# Altium PCB Dout24x.PcbDoc
Units mil, origin at the board's own origin, x right, y up, seen from the top; angles counter-clockwise.
Board outline 2913.39 x 1181.1 mil, 2 copper layers (Top Layer, Bottom Layer); 18 components, 58 nets, 158 pads, 14 vias.
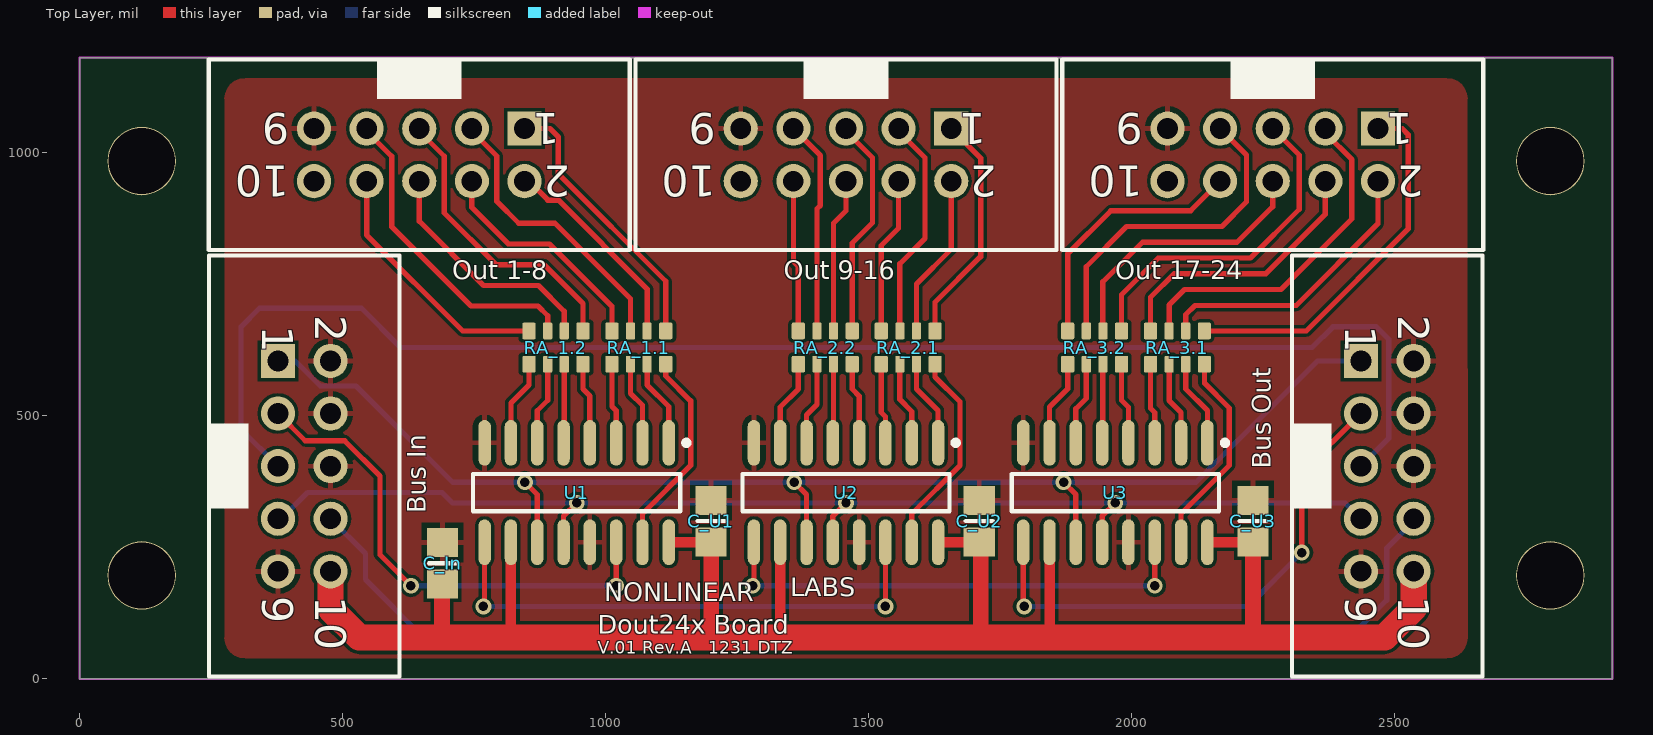
[diagram p0: Top Layer view]
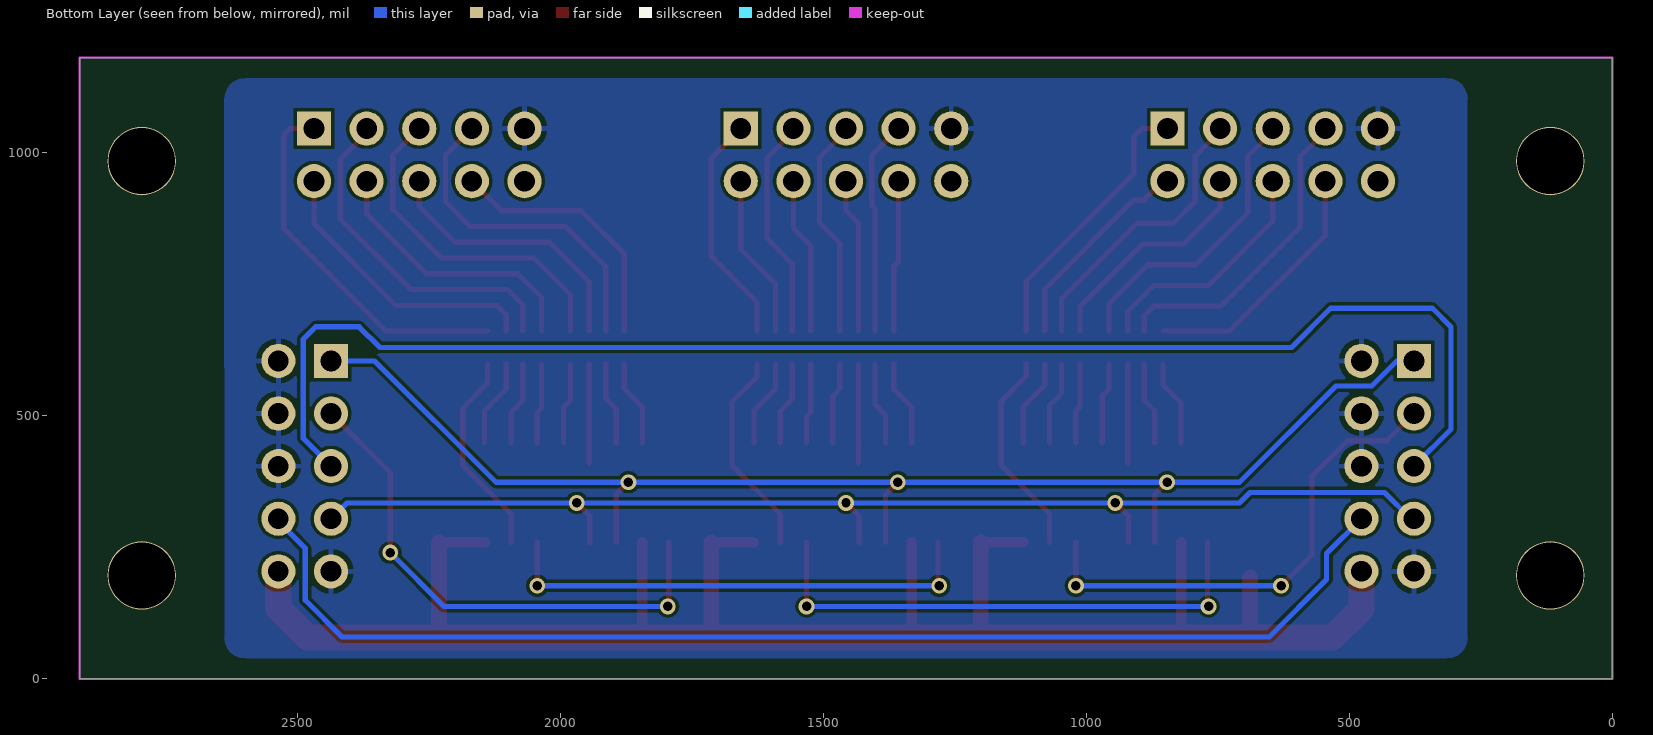
[diagram p1: Bottom Layer view, seen from below]

## Layer stack, top to bottom
Top Layer: signal copper 1.4
Dielectric: core 12.6, FR-4, Dk 4.8
Bottom Layer: signal copper 1.4

## Board outline
0,0 0,1181.1 2913.39,1181.1 2913.39,0

## Design rules (kind name [scope] priority, off if disabled: settings)
Clearance [All] p1: gap=6
ComponentClearance [All] p1 off: gap=10 collisioncheckmode=3 verticalgap=10 showdistances=FALSE
HoleSize [All] p1: absolutevalues=TRUE maxlimit=196.85 minlimit=1 maxpercent=80.000 minpercent=20.000
MinimumSolderMaskSliver [All] p1: minsoldermaskwidth=6
PolygonConnect [All] p1: connectstyle=Relief reliefconductorwidth=10 reliefentries=4 polygonreliefangle="90 Angle" airgapwidth=10
RoutingVias [All] p1: holewidth=28 width=50 viastyle="Through Hole" minholewidth=28 minwidth=50 maxholewidth=28 maxwidth=50
SilkToSilkClearance [All] p1 off: silktosilkclearance=6
SilkscreenOverComponentPads [All] p1 off: minsilkscreentomaskgap=6
SolderMaskExpansion [All] p1: expansion=4
Width [All] p1: maxlimit=78.74 minlimit=6 preferedwidth=10
23 further rules are at their usual default settings.

## Components (designator, comment, footprint, x,y, rotation, side; value= is the part's Value field where it differs from the comment)
"Bus In" "10 pol" 918510x324 427.17,404.53 r270 top (schematic designator P_In)
"Bus Out" "10 pol" 918510x324 2485.43,404.53 r270 top (schematic designator P_Out)
C_In "Cap Semi" 6-0805_M 690,220 r270 top
C_U1 "Cap Semi" 6-0805_M 1200,300 r270 top
C_U2 "Cap Semi" 6-0805_M 1710,300 r270 top
C_U3 "Cap Semi" 6-0805_M 2230,300 r270 top
"Out 1-8" "10 pol" 918510x324 645.67,996.06 r180 top (schematic designator P_Dout_1-8)
"Out 9-16" "10 pol" 918510x324 1456.69,996.06 r180 top (schematic designator P_Dout_9-16)
"Out 17-24" "10 pol" 918510x324 2267.72,996.06 r180 top (schematic designator P_Dout_17-24)
RA_1.1 "EXB38" EXB38 1062.99,629.92 r180 top
RA_1.2 "EXB38" EXB38 905.51,629.92 r180 top
RA_2.1 "EXB38" EXB38 1574.8,629.92 r180 top
RA_2.2 "EXB38" EXB38 1417.32,629.92 r180 top
RA_3.1 "EXB38" EXB38 2086.61,629.92 r180 top
RA_3.2 "EXB38" EXB38 1929.13,629.92 r180 top
U1 "SN74HC595D" D016_N 944.88,354.33 r270 top
U2 "SN74HC595D" D016_N 1456.69,354.33 r270 top
U3 "SN74HC595D" D016_N 1968.5,354.33 r270 top

## Footprints (in the part's own frame and the unit in brackets; to place one, negate y for a bottom-side part, rotate by r counter-clockwise, add the part's x,y. Pads: shape width x height; smd on the part's side, far side on the other; paste and mask are expansions set on the pad)
6-0805_M [mm] "Chip Resistor, Body 2.0x1.2mm, IPC Low Density"
  rect 1.4x1.5 smd: 1(-1,0) 2(1,0)
  silkscreen extent 0,-0.65 0,0.65, body extent -1.07,-0.7 1.07,0.7, height 0.7
918510x324 [mm] "Connector; IDC, Low Profile Male Header, Thru-Hole; 10 Position; Vertical; Pitch 2.54 mm; Body 20.32 x 9.2 x 9.45 mm (LxWxH)"
  rect 1.65x1.65 hole 1: 1(-5.08,-1.27)
  round 1.65 hole 1: 2(-5.08,1.27) 3(-2.54,-1.27) 4(-2.54,1.27) 5(0,-1.27) 6(0,1.27) 7(2.54,-1.27) 8(2.54,1.27) 9(5.08,-1.27) 10(5.08,1.27)
  silkscreen extent -10.16,-4.6 10.16,4.6
D016_N [mm] "SOIC, 16-Leads, Body 9.9x3.9mm, Pitch 1.27mm, IPC Medium Density"
  oval 2.2x0.6 smd: 1(-2.4,4.445) 2(-2.4,3.175) 3(-2.4,1.905) 4(-2.4,0.635) 5(-2.4,-0.635) 6(-2.4,-1.905) 7(-2.4,-3.175) 8(-2.4,-4.445) 9(2.4,-4.445) 10(2.4,-3.175) 11(2.4,-1.905) 12(2.4,-0.635) 13(2.4,0.635) 14(2.4,1.905) 15(2.4,3.175) 16(2.4,4.445)
  silkscreen extent -2.52,-5 0.9,5.42, body extent -1.95,-4.95 1.95,4.95, height 1.75
EXB38 [mm]
  rrect20% 0.64x0.8 smd: 1(-1.3,-0.8) 4(1.3,-0.8) 5(1.3,0.8) 8(-1.3,0.8)
  rrect20% 0.44x0.8 smd: 2(-0.4,-0.8) 3(0.4,-0.8) 6(0.4,0.8) 7(-0.4,0.8)

## Part data
"Bus In" "Bus Out" "Out 1-8" "Out 9-16" "Out 17-24": library part "09 18 510 6324", "Flat Cable Connector (IDC), Low-Profile Male Header, Straight Solder Pin, 10 Contacts, Performance Level 2"
C_In C_U1 C_U2 C_U3: "Capacitor (Semiconductor SIM Model)"
RA_1.1 RA_1.2 RA_2.1 RA_2.2 RA_3.1 RA_3.2: library part "4 Resistors Parallel"
U1 U2 U3: "8-Bit Shift Register with 3-State Output Registers"

## Free pads (board coordinates)
  round 129.92 hole 125.98: ""(118.11,196.85) ""(118.11,984.25) ""(2795.28,196.85) ""(2795.28,984.25)

## Via types
v1: diameter 30, hole 18, Top Layer to Bottom Layer, 14 vias

## Nets (pads, with @x,y where several pads share a name; then routed paths per layer and width w, separated by ;. In a path a pad name is that pad's centre, name@x,y a point inside that pad or via, vN(x,y) a via of type N, cw(c..) or ccw(c..) an arc to the next point about the centre after c; other vN are vias at no path point)
CL: "Bus In.1" "Bus Out.1" U1.11 U2.11 U3.11 | length 2620.9
  Top Layer w10: v1(846.46,374.02) 869.88,350.59 U1.11 ; v1(1358.27,374.02) 1381.69,350.59 U2.11 ; v1(1870.08,374.02) 1893.5,350.59 U3.11
  Bottom Layer w10: 377.17,604.53 410.02,604.53 457.5,557.05 525.63,557.05 708.66,374.02 v1(846.46,374.02) v1(1358.27,374.02) v1(1870.08,374.02) 2122.05,374.02 2352.56,604.53 2435.43,604.53
GND: "Bus In.2" "Bus In.4" "Bus In.6" "Bus In.9" "Bus Out.2" "Bus Out.4" "Bus Out.6" "Bus Out.9" "Out 1-8.9" "Out 9-16.9" "Out 17-24.9" C_In.1 C_U1.1 C_U2.1 C_U3.1 U1.8 U1.13 U2.8 U2.13 U3.8 U3.13
ID: "Bus In.5" "Bus Out.5" | length 2809.4
  Bottom Layer w10: 377.17,404.53 307.09,474.61 307.09,669.29 342.52,704.72 535.43,704.72 610.24,629.92 2342.52,629.92 2381.89,669.29 2464.57,669.29 2487.95,645.91 2487.95,457.05 2435.43,404.53
IG: "Bus In.8" "Bus Out.8" | length 2334
  Bottom Layer w10: 477.17,304.53 543.31,238.39 543.31,188.98 652.28,80 2414.65,80 2484.25,149.61 2484.25,248.31 2535.43,299.49 2535.43,304.53
NetRA_1.1_5: RA_1.1.5 U1.3 | length 152.9
  Top Layer w10: RA_1.1.5 1011.81,518.19 1019.88,510.12 U1.3
NetRA_1.1_6: RA_1.1.6 U1.2 | length 159
  Top Layer w10: RA_1.1.6 1047.24,542.76 1069.88,520.12 U1.2
NetRA_1.1_7: RA_1.1.7 U1.1 | length 166.6
  Top Layer w10: RA_1.1.7 1078.74,559.06 1119.88,517.91 U1.1
NetRA_1.1_8: RA_1.1.8 U1.15 | length 396.1
  Top Layer w10: U1.15 1069.88,313.98 1161.42,405.51 1161.42,528.58 1114.17,575.83 RA_1.1.8
NetRA_1.2_5: RA_1.2.5 U1.7 | length 163.9
  Top Layer w10: U1.7 819.88,524.61 854.33,559.06 RA_1.2.5
NetRA_1.2_6: RA_1.2.6 U1.6 | length 157.8
  Top Layer w10: U1.6 869.88,509.88 889.76,529.76 RA_1.2.6
NetRA_1.2_7: RA_1.2.7 U1.5 | length 187.6
  Top Layer w10: U1.5@921.26,410.83 RA_1.2.7
NetRA_1.2_8: RA_1.2.8 U1.4 | length 155.1
  Top Layer w10: RA_1.2.8 956.69,551.18 969.88,537.99 U1.4
NetRA_2.1_5: RA_2.1.5 U2.3 | length 152.9
  Top Layer w10: RA_2.1.5 1523.62,506.38 1531.69,498.31 U2.3
NetRA_2.1_6: RA_2.1.6 U2.2 | length 159
  Top Layer w10: RA_2.1.6 1559.05,530.94 1581.69,508.31 U2.2
NetRA_2.1_7: RA_2.1.7 U2.1 | length 166.6
  Top Layer w10: RA_2.1.7 1590.55,551.18 1631.69,510.04 U2.1
NetRA_2.1_8: RA_2.1.8 U2.15 | length 396.1
  Top Layer w10: U2.15 1581.69,313.98 1673.23,405.51 1673.23,526.77 1625.98,574.02 RA_2.1.8
NetRA_2.2_5: RA_2.2.5 U2.7 | length 163.9
  Top Layer w10: U2.7 1331.69,516.73 1366.14,551.18 RA_2.2.5
NetRA_2.2_6: RA_2.2.6 U2.6 | length 157.8
  Top Layer w10: U2.6 1381.69,501.69 1401.57,521.57 RA_2.2.6
NetRA_2.2_7: RA_2.2.7 U2.5 | length 189.5
  Top Layer w10: U2.5 U2.5@1433.07,450.2 ; U2.5@1433.07,410.83 RA_2.2.7
NetRA_2.2_8: RA_2.2.8 U2.4 | length 155.1
  Top Layer w10: RA_2.2.8 1468.5,551.18 1481.69,537.99 U2.4
NetRA_3.1_5: RA_3.1.5 U3.3 | length 152.9
  Top Layer w10: RA_3.1.5 2035.43,514.57 2043.5,506.5 U3.3
NetRA_3.1_6: RA_3.1.6 U3.2 | length 159
  Top Layer w10: RA_3.1.6 2070.87,529.13 2093.5,506.5 U3.2
NetRA_3.1_7: RA_3.1.7 U3.1 | length 166.6
  Top Layer w10: RA_3.1.7 2102.36,551.18 2143.5,510.04 U3.1
NetRA_3.1_8: RA_3.1.8 U3.15 | length 396.1
  Top Layer w10: U3.15 2093.5,313.98 2185.04,405.51 2185.04,514.96 2137.8,562.2 RA_3.1.8
NetRA_3.2_5: RA_3.2.5 U3.7 | length 163.9
  Top Layer w10: U3.7 1843.5,516.73 1877.95,551.18 RA_3.2.5
NetRA_3.2_6: RA_3.2.6 U3.6 | length 157.8
  Top Layer w10: U3.6 1893.5,513.5 1913.39,533.39 RA_3.2.6
NetRA_3.2_7: RA_3.2.7 U3.5 | length 189.5
  Top Layer w10: U3.5 U3.5@1944.88,450.2 ; U3.5@1944.88,410.83 RA_3.2.7
NetRA_3.2_8: RA_3.2.8 U3.4 | length 155.1
  Top Layer w10: RA_3.2.8 1980.32,529.68 1993.5,516.5 U3.4
OD: "Bus In.3" U1.14 | length 948.2
  Top Layer w10: 377.17,504.53 428.94,452.76 503.94,452.76 570.87,385.83 570.87,236.22 v1(629.92,177.17) ; v1@1019.88,177.36 U1.14
  Bottom Layer w10: v1(629.92,177.17) v1(1019.68,177.17)
OD_1: U1.9 U2.14 | length 1005.5
  Top Layer w10: v1@769.88,139.96 U1.9 ; v1@1531.69,137.99 U2.14
  Bottom Layer w10: v1(767.72,137.8) v1(1531.5,137.8)
OD_2: U2.9 U3.14 | length 929.8
  Top Layer w10: v1(1279.53,177.17) 1281.69,179.33 U2.9 ; v1@2043.5,177.36 U3.14
  Bottom Layer w10: v1(1279.53,177.17) v1(2043.31,177.17)
OD_3: "Bus Out.3" U3.9 | length 1001.2
  Top Layer w10: v1@1793.5,139.57 U3.9 ; v1(2322.83,240.16) 2322.83,391.93 2435.43,504.53
  Bottom Layer w10: v1(1795.28,137.8) 2220.47,137.8 v1(2322.83,240.16)
OS: "Bus In.7" "Bus Out.7" U1.12 U2.12 U3.12 | length 2355
  Top Layer w10: U1.12 919.88,309.65 v1(944.88,334.65) ; U2.12 1431.69,309.65 v1(1456.69,334.65) ; U3.12 1943.5,309.65 v1(1968.5,334.65)
  Bottom Layer w10: 377.17,304.53 383.27,304.53 433.07,354.33 688.98,354.33 708.66,334.65 v1(944.88,334.65) v1(1456.69,334.65) v1(1968.5,334.65) 2405.31,334.65 2435.43,304.53
OUT_1.1: "Out 1-8.1" RA_1.1.1 | length 524.1
  Top Layer w10: 845.67,1046.06 893.94,1046.06 910,1030 910,960 1114.17,755.83 RA_1.1.1
OUT_1.2: "Out 1-8.2" RA_1.1.2 | length 397.7
  Top Layer w10: 845.67,946.06 853.94,946.06 890,910 910,910 1078.74,741.26 RA_1.1.2
OUT_1.3: "Out 1-8.3" RA_1.1.3 | length 550.1
  Top Layer w10: 745.67,1046.06 745.67,1041.02 793.15,993.54 793.15,907.64 834.65,866.14 903.86,866.14 1047.24,722.76 RA_1.1.3
OUT_1.4: "Out 1-8.4" RA_1.1.4 | length 440.7
  Top Layer w10: 745.67,946.06 745.67,896.06 814.96,826.77 893.23,826.77 1011.81,708.19 RA_1.1.4
OUT_1.5: "Out 1-8.5" RA_1.2.1 | length 566.9
  Top Layer w10: 645.67,1046.06 645.67,1041.02 693.15,993.54 693.15,885.59 791.34,787.4 882.6,787.4 956.69,713.31 RA_1.2.1
OUT_1.6: "Out 1-8.6" RA_1.2.2 | length 459.9
  Top Layer w10: 645.67,946.06 645.67,870.08 767.72,748.03 871.97,748.03 921.26,698.74 RA_1.2.2
OUT_1.7: "Out 1-8.7" RA_1.2.3 | length 601.7
  Top Layer w10: 545.67,1046.06 545.67,1041.02 593.15,993.54 593.15,859.61 744.09,708.66 871.34,708.66 889.76,690.24 RA_1.2.3
OUT_1.8: "Out 1-8.8" RA_1.2.4 | length 486.3
  Top Layer w10: 545.67,946.06 545.67,844.09 728.35,661.42 RA_1.2.4
OUT_2.1: "Out 9-16.1" RA_2.1.1 | length 443.7
  Top Layer w10: RA_2.1.1 1625.98,715.98 1712.6,802.6 1712.6,990.16 1656.69,1046.06
OUT_2.2: "Out 9-16.2" RA_2.1.2 | length 312
  Top Layer w10: RA_2.1.2 1590.55,750.55 1656.69,816.69 1656.69,946.06
OUT_2.3: "Out 9-16.3" RA_2.1.3 | length 425.3
  Top Layer w10: 1556.69,1046.06 1556.69,1041.02 1607,990.72 1607,837 1559.05,789.06 RA_2.1.3
OUT_2.4: "Out 9-16.4" RA_2.1.4 | length 298.3
  Top Layer w10: RA_2.1.4 1523.62,823.62 1556.69,856.69 1556.69,946.06
OUT_2.5: "Out 9-16.5" RA_2.2.1 | length 421.4
  Top Layer w10: 1456.69,1046.06 1456.69,1041.02 1507,990.72 1507,867 1468.5,828.5 RA_2.2.1
OUT_2.6: "Out 9-16.6" RA_2.2.2 | length 294.4
  Top Layer w10: RA_2.2.2 1433.07,866.14 1456.69,889.76 1456.69,946.06
OUT_2.7: "Out 9-16.7" RA_2.2.3 | length 408.6
  Top Layer w10: 1356.69,1046.06 1408,994.76 1408,900 1401.57,893.57 RA_2.2.3
OUT_2.8: "Out 9-16.8" RA_2.2.4 | length 288.6
  Top Layer w10: 1356.69,946.06 1356.69,793.31 1366.14,783.86 RA_2.2.4
OUT_3.1: "Out 17-24.1" RA_3.1.1 | length 709.3
  Top Layer w10: RA_3.1.1 2331.42,661.42 2525,855 2525,1035 2513.94,1046.06 2467.72,1046.06
OUT_3.2: "Out 17-24.2" RA_3.1.2 | length 548.7
  Top Layer w10: RA_3.1.2 2102.36,692.36 2120,710 2312.36,710 2467.72,865.35 2467.72,946.06
OUT_3.3: "Out 17-24.3" RA_3.1.3 | length 656.6
  Top Layer w10: RA_3.1.3 2070.87,710.87 2100,740 2283.31,740 2418,874.69 2418,987 2367.72,1037.28 2367.72,1046.06
OUT_3.4: "Out 17-24.4" RA_3.1.4 | length 524.4
  Top Layer w10: RA_3.1.4 2035.43,725.43 2080,770 2254.25,770 2367.72,883.46 2367.72,946.06
OUT_3.5: "Out 17-24.5" RA_3.2.1 | length 648
  Top Layer w10: RA_3.2.1 1980.32,730.32 2050,800 2225.2,800 2318,892.8 2318,995.78 2267.72,1046.06
OUT_3.6: "Out 17-24.6" RA_3.2.2 | length 523.8
  Top Layer w10: RA_3.2.2 1944.88,754.88 2020,830 2200,830 2267.72,897.72 2267.72,946.06
OUT_3.7: "Out 17-24.7" RA_3.2.3 | length 637.7
  Top Layer w10: RA_3.2.3 1913.39,783.39 1990,860 2171.02,860 2218,906.98 2218,995.78 2167.72,1046.06
OUT_3.8: "Out 17-24.8" RA_3.2.4 | length 493.5
  Top Layer w10: RA_3.2.4 1877.95,807.95 1960,890 2111.65,890 2167.72,946.06
VCC: "Bus In.10" "Bus Out.10" C_In.2 C_U1.2 C_U2.2 C_U3.2 U1.10 U1.16 U2.10 U2.16 U3.10 U3.16 | length 3645.3
  Top Layer w20: 819.88,103.35 U1.10 ; U1.16 C_U1.2@1200.79,259.84 ; 1331.69,78.74 U2.10 ; U2.16 C_U2.2@1712.6,259.84 ; 1843.5,78.74 U3.10 ; U3.16 C_U3.2@2230,259.84
  Top Layer w30: 688.98,102.36 C_In.2@688.98,192.91 ; 1200.79,80 C_U1.2@1200.79,259.84 ; 1712.6,78.74 C_U2.2@1712.6,259.84 ; 2230,78.74 C_U3.2@2230,259.84
  Top Layer w50: 477.17,204.53 477.17,133.07 531.5,78.74 2480.32,78.74 2535.43,133.86 2535.43,204.53
pads on no net: "Out 1-8.10" "Out 9-16.10" "Out 17-24.10"

## Polygon pours and split planes (outlines as drawn)
GND on Top Layer "GND" (solid, remove dead copper, pour order 2): 275.59,1102.36 cw(c314.96,1102.36) 314.96,1141.73 2598.43,1141.73 cw(c2598.43,1102.36) 2637.8,1102.36 2637.8,78.74 cw(c2598.43,78.74) 2598.43,39.37 314.96,39.37 cw(c314.96,78.74) 275.59,78.74
GND on Bottom Layer "GND" (solid, remove dead copper, pour order 4): 275.59,1102.36 275.59,78.74 ccw(c314.96,78.74) 314.96,39.37 2598.43,39.37 ccw(c2598.43,78.74) 2637.8,78.74 2637.8,1102.36 ccw(c2598.43,1102.36) 2598.43,1141.73 393.7,1141.73 314.96,1141.73 ccw(c314.96,1102.36) 275.59,1102.36

## Keep-outs
Keep-Out Layer:
  the board outline again, w3.94

## Silkscreen, mask and mechanical layers (free items; w line width, h text height)
Top Overlay:
  text "LABS" at 1350.78,145.86 h60
  text "NONLINEAR" at 997.43,136.29 h60
  text "Dout24x Board" at 985,75 h60
  text "V.01 Rev.A   1231 DTZ" at 985,40 h40

## Text inside footprints (layer, text, board x,y; h text height)
"Bus In": Top Overlay "2" at 447.64,691.13 h59.06 r270; Top Overlay "1" at 347.64,671.45 h59.06 r270; Top Overlay "10" at 447.64,157.28 h59.06 r270; Top Overlay "9" at 347.64,157.28 h59.06 r270
"Bus Out": Top Overlay "2" at 2505.91,691.13 h59.06 r270; Top Overlay "1" at 2405.91,671.45 h59.06 r270; Top Overlay "9" at 2405.91,157.28 h59.06 r270; Top Overlay "10" at 2505.91,157.28 h59.06 r270
"Out 1-8": Top Overlay "1" at 912.59,1075.59 h59.06 r180; Top Overlay "2" at 932.27,975.59 h59.06 r180; Top Overlay "9" at 398.43,1075.59 h59.06 r180; Top Overlay "10" at 398.43,975.59 h59.06 r180
"Out 9-16": Top Overlay "1" at 1723.61,1075.59 h59.06 r180; Top Overlay "2" at 1743.3,975.59 h59.06 r180; Top Overlay "9" at 1209.45,1075.59 h59.06 r180; Top Overlay "10" at 1209.45,975.59 h59.06 r180
"Out 17-24": Top Overlay "1" at 2534.64,1075.59 h59.06 r180; Top Overlay "2" at 2554.32,975.59 h59.06 r180; Top Overlay "9" at 2020.47,1075.59 h59.06 r180; Top Overlay "10" at 2020.47,975.59 h59.06 r180